# Altium PCB high-spped-thermocouple-logger-2ch_panel.PcbDoc (part 1 of 2)
Units mm, origin at the board's own origin, x right, y up, seen from the top; angles counter-clockwise.
Board outline 100 x 200 mm, 4 copper layers (Top Layer, GND Layer, VCC Layer, Bottom Layer), stack 1.55 mm thick; 2 components, 0 nets, 0 pads, 0 vias.
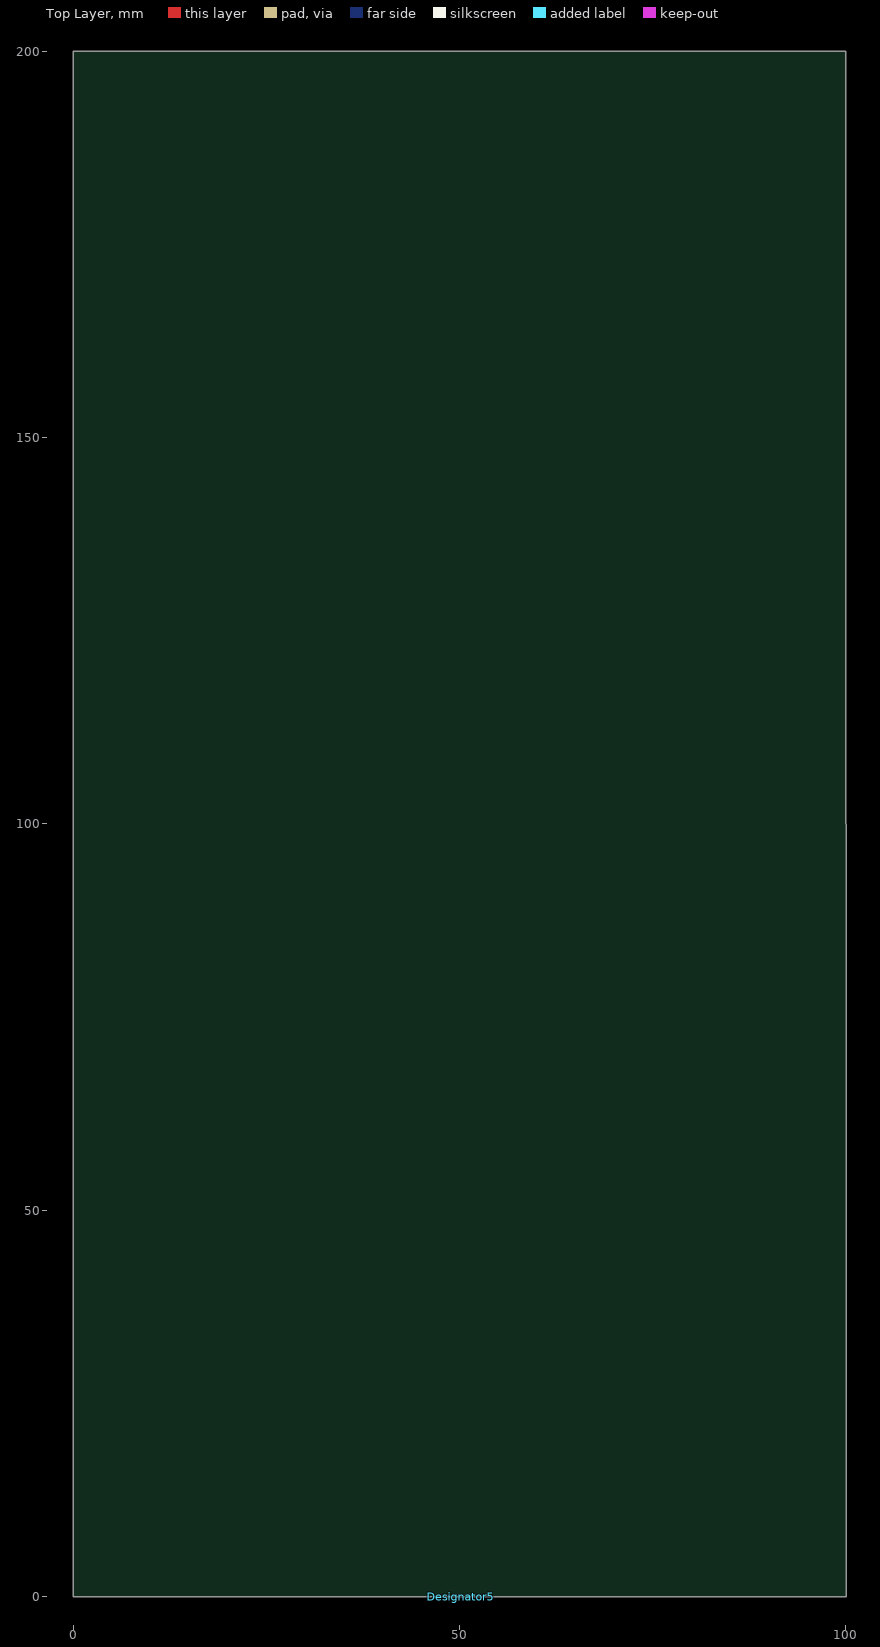
[diagram p0: Top Layer view]
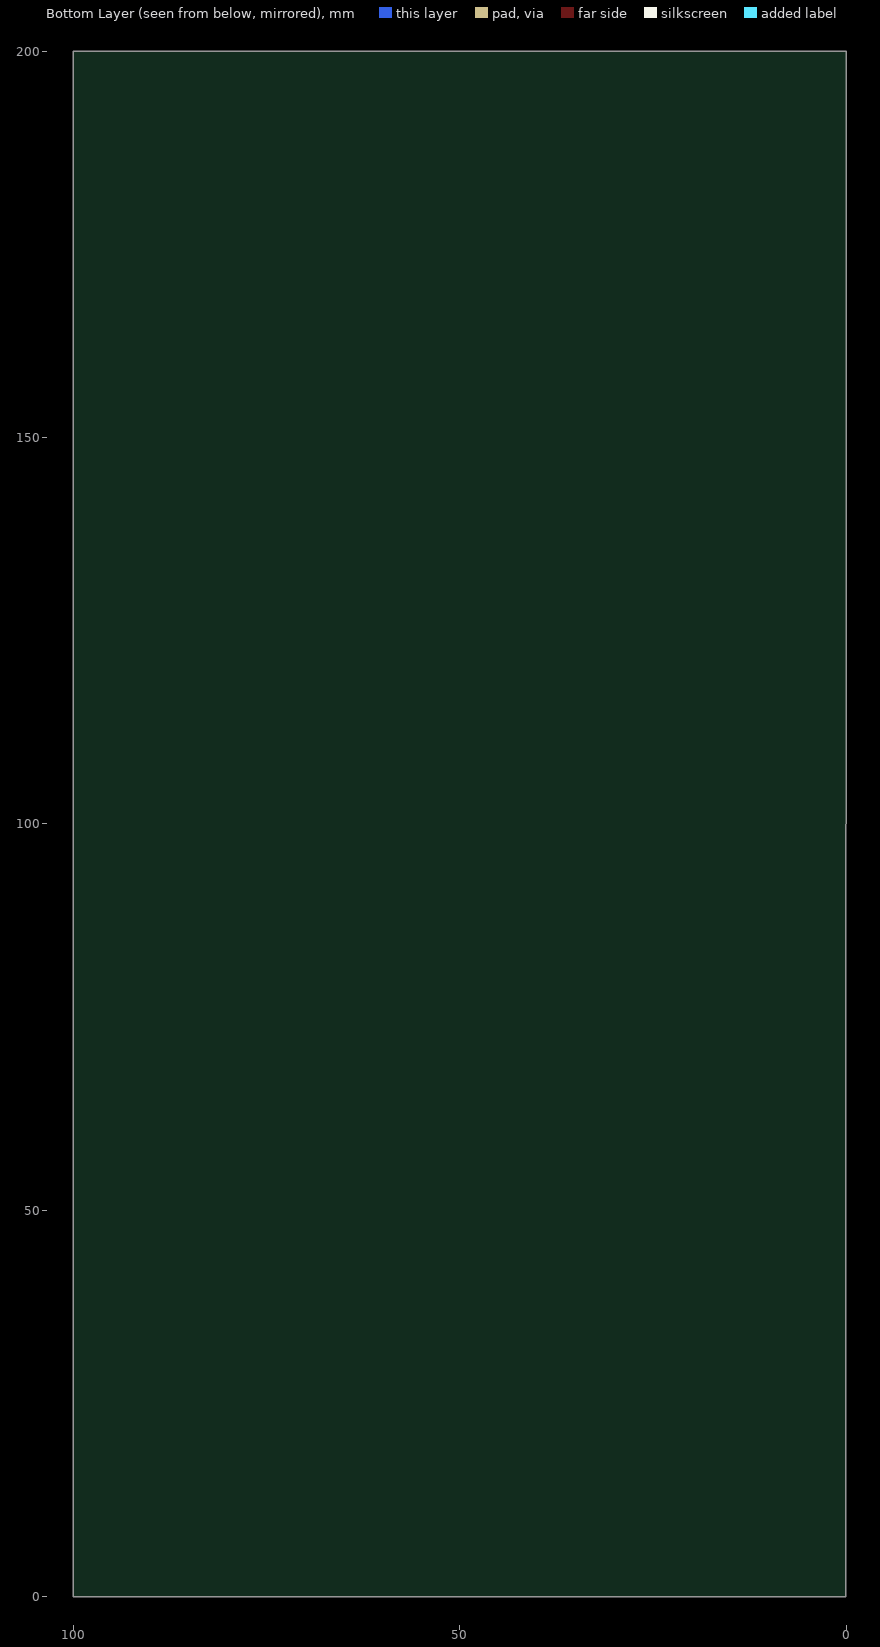
[diagram p1: Bottom Layer view, seen from below]
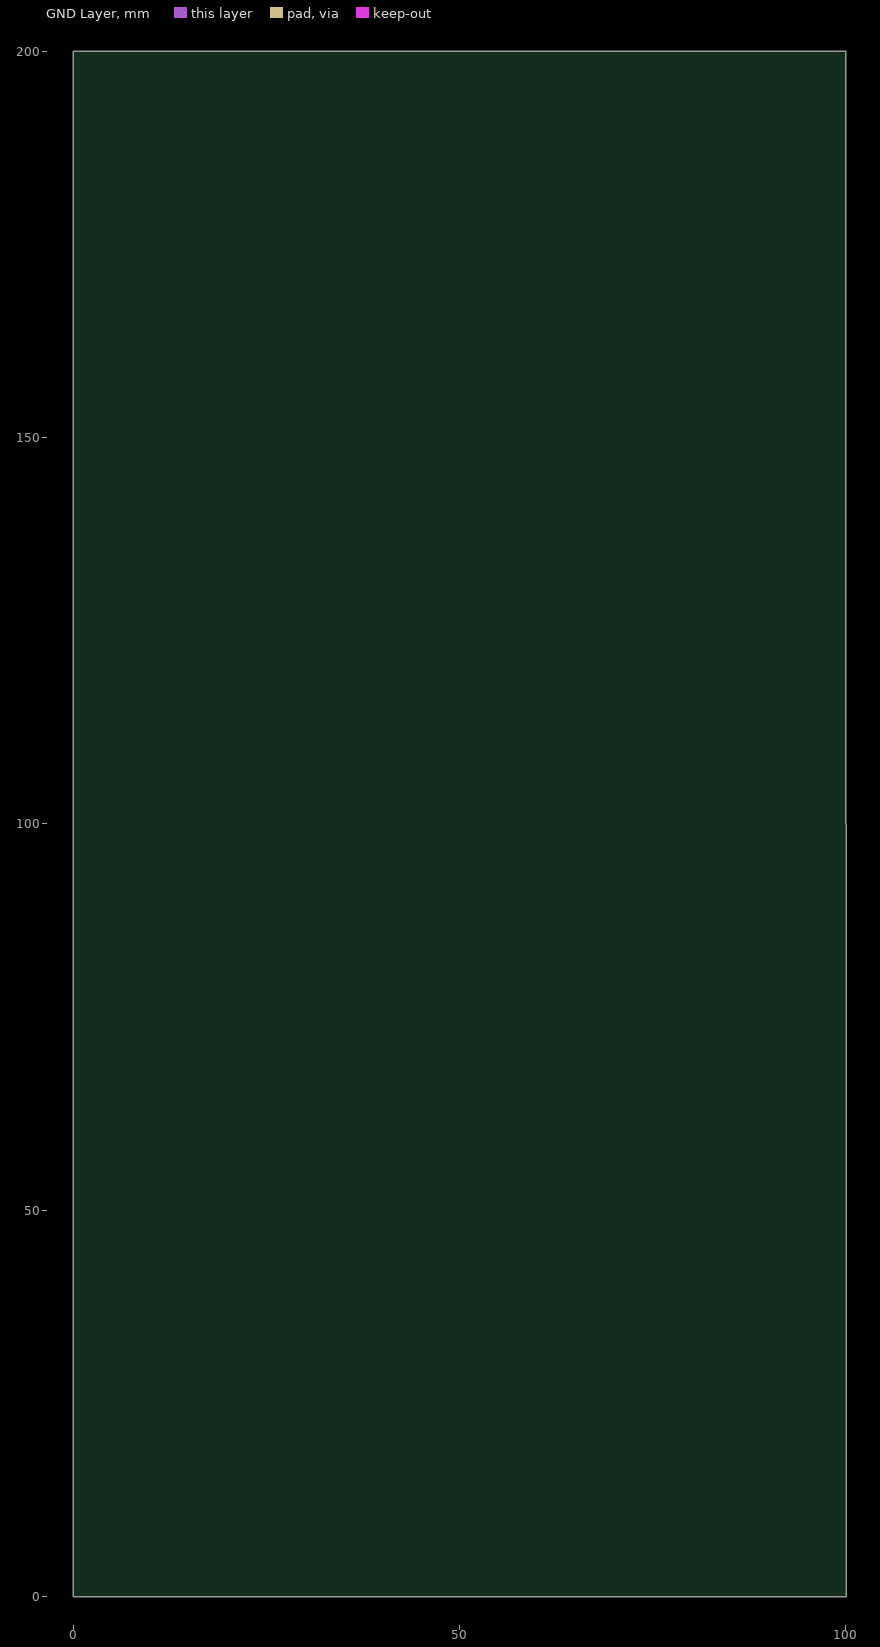
[diagram p2: GND Layer]
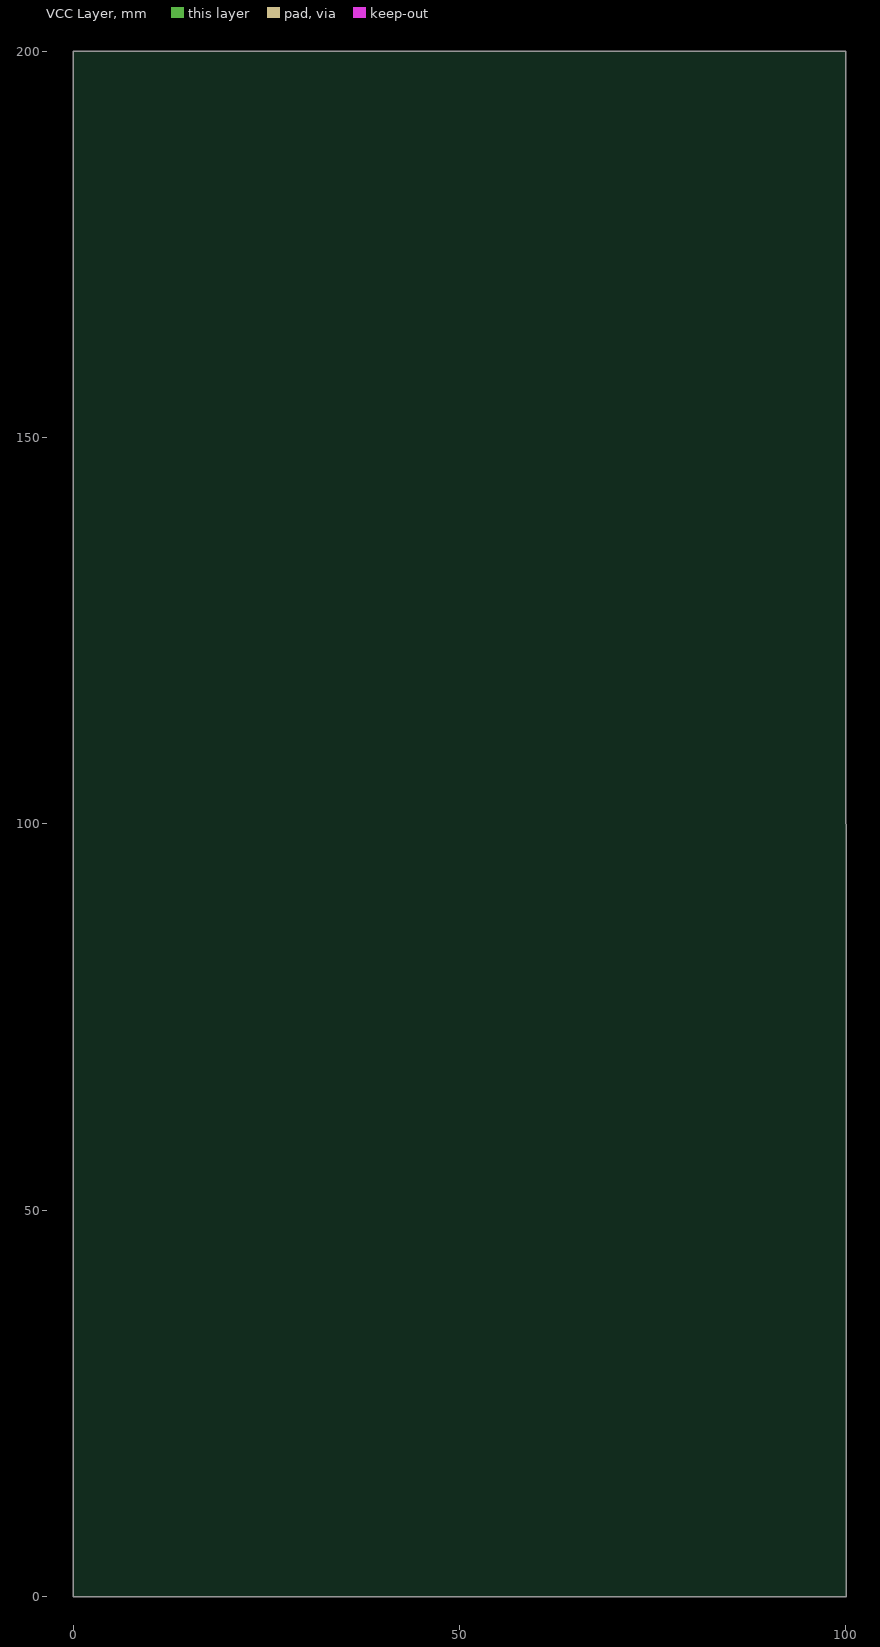
[diagram p3: VCC Layer]

## Layer stack, top to bottom
Top Solder Mask: solder mask 0.005, Solder Resist, Dk 3.5
Top Layer: signal copper 0.035
Dielectric 1: prepreg 0.35, FR-4, Dk 4.2
GND Layer: signal copper 0.035
Dielectric 3: core 0.71, FR-4, Dk 4.2
VCC Layer: signal copper 0.035
Dielectric 2: prepreg 0.35, FR-4, Dk 4.2
Bottom Layer: signal copper 0.035
Bottom Solder Mask: solder mask 0.005, Solder Resist, Dk 3.5

## Board outline
0,0 0,200 100,200 100,0

## Design rules (kind name [scope] priority, off if disabled: settings)
AssemblyTestPointUsage [All] p1 off: valid=2 // Not used
AssemblyTestpoint AssemblyTestpoint_THT [(IsVia) Or (IsPad And OnMultiLayer)] p1: testpointundercomponent=TRUE minsize=0 maxsize=100 preferedsize=0 minholesize=0 maxholesize=100 preferedholesize=0 testpointgrid=0.025 usegrid=FALSE gridtolerance=0 allowsidetop=TRUE allowsidebottom=TRUE minspacing=2.54 // THT testpoints (component pads)
AssemblyTestpoint AssemblyTestpoint_SMD [(IsPad And (OnTopLayer Or OnBottomLayer)) and not(HasFootprint('FXPSWITCH_PAD') or HasFootprint ('FXPSWITCH_PAD_ALT1'))] p2: testpointundercomponent=TRUE minsize=1 maxsize=100 preferedsize=0 minholesize=0 maxholesize=100 preferedholesize=0 testpointgrid=0.025 usegrid=FALSE gridtolerance=0 allowsidetop=TRUE allowsidebottom=TRUE minspacing=2.54 padholecenterclearance=1 // SMD testpoints except present switch
AssemblyTestpoint [All] p3 off: testpointundercomponent=TRUE minsize=1.016 maxsize=2.54 preferedsize=1.524 minholesize=0 maxholesize=1.016 preferedholesize=0.813 testpointgrid=0.025 usegrid=TRUE gridtolerance=0 allowsidetop=TRUE allowsidebottom=TRUE
BoardOutlineClearance X_BoardOutlineClearance [HasFootprint('MOUSE_BITES_3X_2_4MM') or  HasFootprint('MOUSE_BITES_5X_2_4MM') or HasFootprint('IN_TAB_2_4_EXT')] p1: gap=0 ignorepadtopadclearanceinfootprint=FALSE // Excluded components
BoardOutlineClearance [All] p2: gap=0.3 ignorepadtopadclearanceinfootprint=FALSE
Clearance "NPT Hole" [(InPadClass('NPTH'))] p1: gap=0.3 ignorepadtopadclearanceinfootprint=FALSE except(0: Arc-Hole Track-Hole SMDPad-Hole THPad-Hole Via-Hole Fill-Hole Poly-Hole Region-Hole Text-Hole) // Copper Clearance to NPT Hole
Clearance [All] p2: gap=0.2 ignorepadtopadclearanceinfootprint=FALSE except(0: Arc-Hole Track-Hole SMDPad-Hole THPad-Hole Via-Hole Fill-Hole Poly-Hole Region-Hole Text-Hole)
ComponentClearance [Not (HasFootprint('PASTE_STENCIL')) vs Not (HasFootprint('PASTE_STENCIL'))] p1: gap=0.25 collisioncheckmode=3 verticalgap=0.25 showdistances=TRUE
FabricationTestPointUsage [All] p1 off: valid=0 allowmultiple=FALSE
FabricationTestpoint [All] p1 off: side=3 testpointundercomponent=TRUE minsize=1.016 maxsize=2.54 preferedsize=1.524 minholesize=0 maxholesize=1.016 preferedholesize=0.813 testpointgrid=0.025 allowsidetop=TRUE allowsidebottom=TRUE usegrid=TRUE gridtolerance=0
Height [All] p1: minheight=0 maxheight=80 prefheight=7
HoleSize [All] p1: absolutevalues=TRUE maxlimit=6 minlimit=0.35 maxpercent=80.000 minpercent=20.000
HoleToHoleClearance [All] p1: gap=0.25 allowstackedmicrovias=TRUE
MinimumAnnularRing [All] p1: minimumring=0.2
MinimumSolderMaskSliver [All] p1: minsoldermaskwidth=0.07
PlaneClearance [All] p1: clearance=0.15
PlaneConnect [All] p1: planeconnectstyle=Relief reliefexpansion=0.5 reliefentries=4 reliefconductorwidth=0.25 reliefairgap=0.25
PolygonConnect "Via Connect" [IsVia] p1: connectstyle=Direct reliefconductorwidth=0.254 reliefentries=4 polygonreliefangle="90 Angle" airgapwidth=0.254 // Via connection style
PolygonConnect [All] p2: connectstyle=Relief reliefconductorwidth=0.25 reliefentries=4 polygonreliefangle="90 Angle" airgapwidth=0.25
RoutingCorners [All] p1: cornerstyle=45-Degree minsetback=2.5 maxsetback=2.5
RoutingVias [All] p1: holewidth=0.4 width=0.8 viastyle="Through Hole" minholewidth=0.2 minwidth=0.6 maxholewidth=1 maxwidth=1.6 useviatemplates=TRUE viatemplateguid#1={26E1B80A-D5C0-4505-9623-F9CB59458B7C} viatemplateguid#2={36E1CC21-96E2-49A4-88B6-F2B68A4AE673} viatemplateguid#3={0111366E-BFF6-48C7-B537-6C96D691991D} viatemplateguid#4={0E0C0ADB-85E7-4A3B-837A-9DB01CC425C1} viatemplateguid#5={2AE59D33-7222-4D26-9EBE-4F327D78EEDC} viatemplateguid#6={04F958C5-3098-48F3-841F-9266846BFB57} viatemplateguid#7={3EBD0A92-59C6-4A03-9F1B-9C85124118A6} viatemplateguid#8={D374DE30-929E-4757-A35D-CCDF97954E77} viatemplateguid#9={7387BB7D-B2C7-482F-BFEA-A07FA82CF54E} viatemplatename#1=v50h15m22 viatemplatename#2=v60h20m28 viatemplatename#3=v80h40m48 viatemplatename#4=v110h70m78 viatemplatename#5=v140h90 viatemplatename#6=v160h100m108 viatemplatename#7=v170h110 viatemplatename#8=v200h130 viatemplatename#9=v260h150
SMDEntry [All] p1: side=TRUE corner=FALSE anyangle=FALSE
SMDEntry ResistorArray_Exit [HasFootprint('CAC-50P200X100-8M')] p2: side=TRUE corner=FALSE anyangle=FALSE
SMDToCorner ResistorArray_NeckDown [HasFootprint('CAC-50P200X100-8M')] p1: distance=78740
SilkToSilkClearance [All] p1: silktosilkclearance=0.1
SilkToSolderMaskClearance [IsPad] p1: minsilkscreentomaskgap=0.1 clearancetoexposedcopper=FALSE
SolderMaskExpansion "PTH Via" [IsVia] p1: expansion=0.075 istentingtop=FALSE soldermaskfromhole=TRUE
SolderMaskExpansion [All] p2: expansion=0.1 istentingtop=FALSE
Width [All] p1: maxlimit=5 minlimit=0.15 preferedwidth=0.3
16 further rules are at their usual default settings.

## Components (designator, comment, footprint, x,y, rotation, side; value= is the part's Value field where it differs from the comment)
Designator4 "Comment" PCB_INFO_4L -49.85,-41.998 r0 top
Designator5 "Comment" PASTE_STENCIL 50.15,0.002 r0 top

## Footprints (in the part's own frame and the unit in brackets; to place one, negate y for a bottom-side part, rotate by r counter-clockwise, add the part's x,y. Pads: shape width x height; smd on the part's side, far side on the other; paste and mask are expansions set on the pad)
PASTE_STENCIL [mm] "Solder Paste Stencil"
PCB_INFO_4L [mm] "PCB Info table for 4L PCB, with additional info."

## Part data
Designator4: library part 000-TABPCB100
Designator5: library part 000-STENCIL100

## Nets (pads, with @x,y where several pads share a name; then routed paths per layer and width w, separated by ;. In a path a pad name is that pad's centre, name@x,y a point inside that pad or via, vN(x,y) a via of type N, cw(c..) or ccw(c..) an arc to the next point about the centre after c; other vN are vias at no path point)

## Silkscreen, mask and mechanical layers (free items; w line width, h text height)
Panel Outline:
  the board outline again, w0.2
Route Tool Path:
  the board outline again, w0.5